# EAGLE board AtxPowerDispatcher3 (EAGLE 6.1)
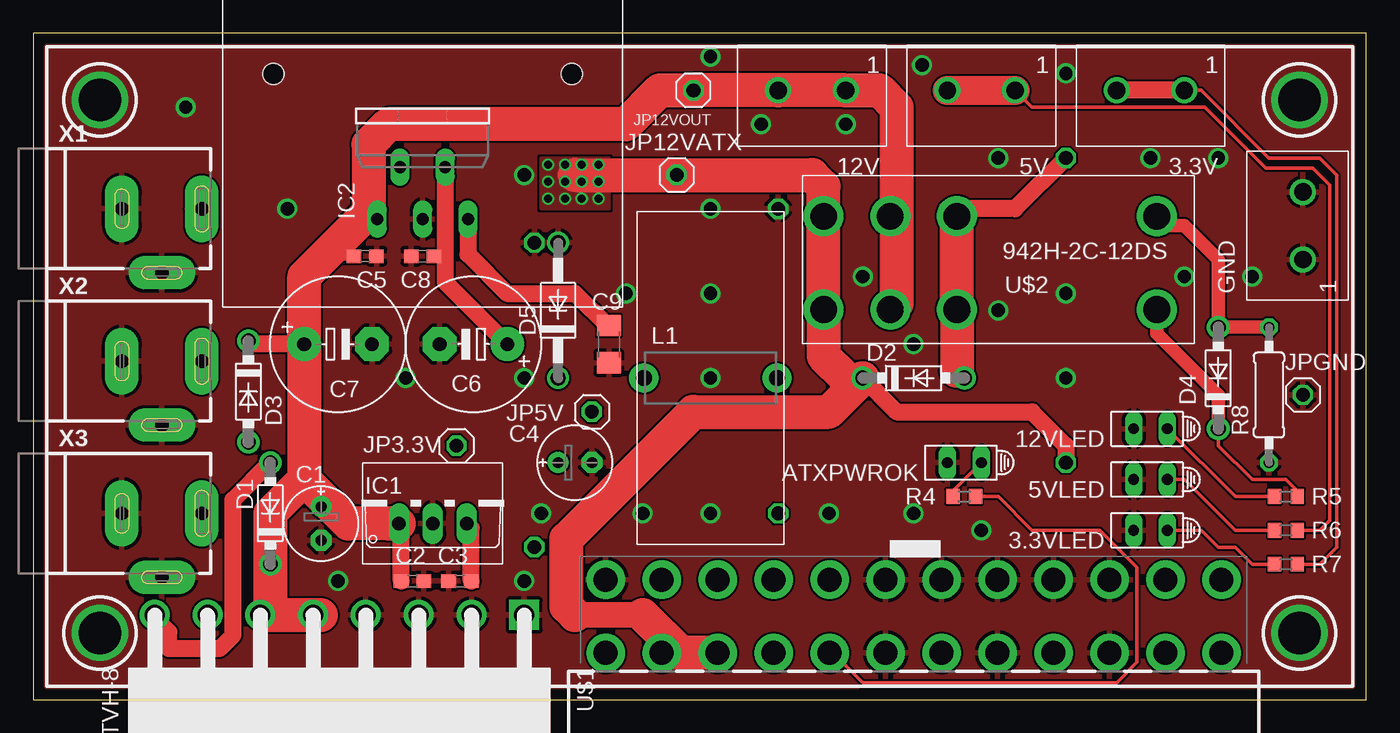
[diagram p0: board, top side]
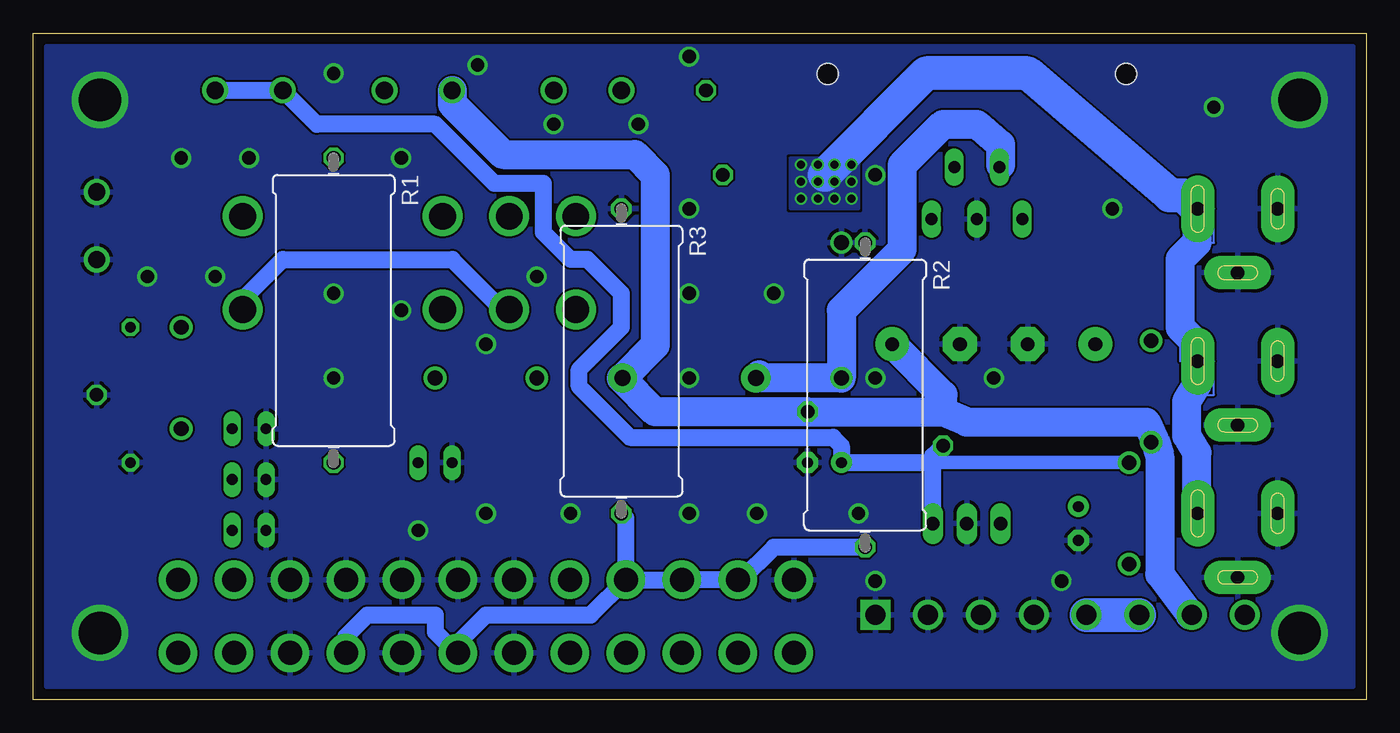
[diagram p1: board, bottom side, seen from below]

Size 100 x 50 mm. Coordinates in mm from the lower left corner, seen from the top.
Outline: 0,0 100,0 100,50 0,50 0,0
Copper layers (1*16): Top 0.035mm / dielectric 1.5mm / Bottom 0.035mm
Design rules: minimum track width 6mil, minimum drill 12mil, track to track 6mil, track to pad 6mil, pad to pad 6mil, via to via 6mil, smd to smd 0mil, copper to edge 0mil, drill to drill 10mil, minimum pad ring 10mil, minimum via ring 6mil, stop-mask expansion 2mil, vias tented up to drill 100mil, thermal gap 10mil

## Footprints (pad centres in the part's own frame; a part is rotated, then mirrored left to right if it is on the bottom)
1X02_BIG = drill 1.3: P$1 0,0; P$2 5.08,0
HLMP6 = drill 0.813 long: A -1.27,0; K 1.27,0
E2,5-6E = drill 0.813 pad 1.575: + -1.27,0 | drill 0.813 pad 1.575 octagon: - 1.27,0
C0603 = smd 1.1 x 1: 1 -0.85,0; 2 0.85,0
E5-10,5 = drill 1.016 pad 2.54: + -2.54,0 | drill 1.016 pad 2.54 octagon: - 2.54,0
C1206 = smd 1.6 x 1.8: 1 -1.4,0; 2 1.4,0
DO41-7.6 = drill 1.1 pad 1.7: A 3.81,0; C -3.81,0
DO41Z10 = drill 1.118: A 5.08,0; C -5.08,0
TO220V = drill 1.016 long: 1 -2.54,-2.54; 2 0,-2.54; 3 2.54,-2.54
TO220-5 = drill 0.9 long: 1 -3.4,-8.4; 2 -1.7,-4.5; 3 0,-8.4; 4 1.7,-4.5; 5 3.4,-8.4 | hole 1.6: -11.2,2.5; 11.2,2.5
ATX24_RIGHT_ANGLE = drill 1.8 pad 2.9: 1 23.1,4.76; 2 18.9,4.76; 3 14.7,4.76; 4 10.5,4.76; 5 6.3,4.76; 6 2.1,4.76; 7 -2.1,4.76; 8 -6.3,4.76; 9 -10.5,4.76; 10 -14.7,4.76; 11 -18.9,4.76; 12 -23.1,4.76; 13 23.1,10.26; 14 18.9,10.26; 15 14.7,10.26; 16 10.5,10.26; 17 6.3,10.26; 18 2.1,10.26; 19 -2.1,10.26; 20 -6.3,10.26; 21 -10.5,10.26; 22 -14.7,10.26; 23 -18.9,10.26; 24 -23.1,10.26
1X01 = drill 1.016 octagon: 1 0,0
2200-12.7 = drill 1.2 pad 2.184: 1 -5,0; 2 5,0
0922/22 = drill 1.016 octagon: 1 -11.43,0; 2 11.43,0
R0603 = smd 1 x 1.1: 1 -0.85,0; 2 0.85,0
0207/10 = drill 0.813 octagon: 1 -5.08,0; 2 5.08,0
VH_8 = drill 1.5 square: 1 0,0 | drill 1.5: 2 3.96,0; 3 7.92,0; 4 11.88,0; 5 15.84,0; 6 19.8,0; 7 23.76,0; 8 27.72,0
942H = drill 2: 1 -11.9,3.75; 2 3.1,3.75; 3 8.1,3.75; 4 13.1,3.75; '1 -11.9,-3.25; '2 3.1,-3.25; '3 8.1,-3.25; '4 13.1,-3.25
2DC-0005D100 = drill 1 pad 2.5 long: 1 3.75,0; 2 -2.25,0; 3 0.75,-4.8

## Placement (x,y rotation side)
3.3V  [1X02_BIG]  86.36,45.72 180 top
3.3VLED  HLMP6  [HLMP6]  83.82,12.7 180 top
5V  [1X02_BIG]  73.66,45.72 180 top
5VLED  HLMP6  [HLMP6]  83.82,16.51 180 top
12V  [1X02_BIG]  60.96,45.72 180 top
12VLED  HLMP6  [HLMP6]  83.82,20.32 180 top
ATXPWROK  HLMP6  [HLMP6]  69.85,17.78 180 top
C1  33u  [E2,5-6E]  21.59,13.21 270 top
C2  0.1u  [C0603]  28.45,8.89 0 top
C3  0.1u  [C0603]  32,8.89 180 top
C4  100u  [E2,5-6E]  40.64,17.78 0 top
C5  0.1u  [C0603]  24.89,33.27 0 top
C6  1000uF low-ESR  [E5-10,5]  22.86,26.67 0 top
C7  1000uF low-ESR  [E5-10,5]  33.02,26.67 180 top
C8  0.1u  [C0603]  29.21,33.27 180 top
C9  10u  [C1206]  43.18,26.67 270 top
D1  1N5817-B  [DO41-7.6]  17.78,13.97 90 top
D2  1N5817-B  [DO41-7.6]  66.04,24.13 0 top
D3  1N5817-B  [DO41-7.6]  16.13,23.11 270 top
D4  1N5817-B  [DO41-7.6]  88.9,24.13 90 top
D5  1N4728  [DO41Z10]  39.37,29.21 90 top
GND  [1X02_BIG]  95.25,33.02 90 top
IC1  788TV  [TO220V]  29.97,15.75 0 top
IC2  SI-8050  [TO220-5]  29.21,44.45 0 top
J1  ATX24RH  [ATX24_RIGHT_ANGLE]  66.04,-1.27 0 top
JP3.3V  [1X01]  31.75,19.05 90 top
JP5V  [1X01]  41.91,21.59 0 top
JP12VATX  [1X01]  48.26,39.37 0 top
JP12VOUT  [1X01]  49.53,45.72 180 top
JPGND  [1X01]  95.25,22.86 0 top
L1  47uH  [2200-12.7]  50.8,24.13 0 top
R1  30 5W  [0922/22]  77.47,29.21 270 bottom
R2  5 5W  [0922/22]  37.59,22.86 270 bottom
R3  5 5W  [0922/22]  55.88,25.4 270 bottom
R4  1k  [R0603]  69.85,15.24 0 top
R5  1k  [R0603]  93.98,15.24 0 top
R6  1k  [R0603]  93.98,12.7 0 top
R7  1k  [R0603]  93.98,10.16 0 top
R8  90ohm 1/4W  [0207/10]  92.71,22.86 90 top
U$1  TUS_POWER_SOCKETVH-8  [VH_8]  36.83,6.35 180 top
U$2  942H-2C-12DS  [942H]  72.39,33.02 180 top
X1  DCJACK  [2DC-0005D100]  8.89,36.83 0 top
X2  DCJACK  [2DC-0005D100]  8.89,25.4 0 top
X3  DCJACK  [2DC-0005D100]  8.89,13.97 0 top

## Library data of the parts
3.3V 5V 12V GND IC1 IC2 L1 U$1 U$2 = myparts
3.3VLED 5VLED 12VLED ATXPWROK = display-hp; MF: AGILENT TECHNOLOGIES; MPN: HLMP-6500; OC_FARNELL: 1652490; OC_NEWARK: 40K0088
C1-C9 R4-R7 = rcl
D1-D5 = diode
J1 = SparkFun
JP3.3V JP5V JP12VATX JP12VOUT JPGND = pinhead
R1-R3 R8 = resistor
X1-X3 = kamiki-dcjack

## Nets
3.3V: 3.3V.P$1 3.3V.P$2 C3.1 C4.+ D1.A IC1.3 JP3.3V.1 R7.2 U$1.8
+5V: 5V.P$1 5V.P$2 C7.+ C8.1 D3.A IC2.4 JP5V.1 L1.2 R6.2 U$1.7
+12V: 12V.P$1 12V.P$2 C1.+ C2.1 C5.1 C6.+ D1.C D3.C D4.C IC1.1 IC2.1 JP12VOUT.1 R5.2 U$1.5 U$1.6 U$2.1 U$2.3 U$2.'3
GND: 3.3VLED.K 5VLED.K 12VLED.K ATXPWROK.K C1.- C2.2 C3.2 C4.- C5.2 C6.- C7.- C8.2 C9.2 D5.A GND.P$1 GND.P$2 IC1.2 IC2.3 J1.3 J1.5 J1.7 J1.15 J1.16 J1.17 J1.18 J1.19 J1.24 JPGND.1 R2.1 R3.1 R8.1 U$1.1 U$1.2 U$1.3 U$1.4 X1.2 X1.3 X2.2 X2.3 X3.2 X3.3
N$1: 12VLED.A R5.1
N$2: J1.8 R4.2
N$3: J1.4 J1.6 J1.21 J1.22 J1.23 R2.2 R3.2
N$4: 5VLED.A R6.1
N$5: 3.3VLED.A R7.1
N$6: ATXPWROK.A R4.1
N$8: D4.A R8.2 U$2.'1
N$9: D5.C IC2.2 L1.1
N$10: D2.A R1.1 U$2.2 U$2.'2
N$11: D2.C J1.10 J1.11 JP12VATX.1 R1.2 U$2.4 U$2.'4 X1.1 X2.1 X3.1
N$17: C9.1 IC2.5

## Tracks (layer width: path | path; a pad name or v marks a point on that pad's centre or on a via)
3.3V
  Top 0.152: 8.89,6.35 U$1.8
  Top 0.254: R7.2 96.52,10.16 97.79,11.43 97.79,39.37 96.52,40.64 92.71,40.64 87.63,45.72 3.3V.P$1
  Top 1.27: 3.3V.P$1 3.3V.P$2 | U$1.8 9.11,6.32 | D1.A 14.99,14.99 14.99,4.83 13.97,3.81 10.16,3.81 10.16,5.08 8.89,6.35 | C3.1 32.85,12.87 IC1.3
  Bottom 1.016: 32.51,17.78 D1.A | IC1.3 32.51,13.46
  Bottom 1.27: 3.3V.P$1 3.3V.P$2 78.74,43.18 69.85,43.18 65.41,38.73 61.72,38.73 61.72,35.05 59.69,33.02 58.42,33.02 55.88,30.48 55.88,27.94 59.05,24.77 59.05,23.5 55.24,19.68 40.01,19.68 39.37,19.05 C4.+ 32.51,17.78 | 32.51,13.46 32.51,17.78 | 32.51,17.78 32.51,18.29 JP3.3V.1
+5V
  Top 0.152: C8.1 30.48,33.02 30.91,33.02
  Top 0.254: 5V.P$1 74.93,44.45 87.88,44.45 92.46,39.88 96.01,39.88 97.28,38.61 97.28,13.46 96.52,12.7 R6.2
  Top 1.27: IC2.4 30.91,33.02 30.91,31.32 C7.+
  Top 2.184: 5V.P$2 5V.P$1
  Bottom 0.152: 13.21,6.35 U$1.7 | D3.A 16.51,19.05 15.88,19.43
  Bottom 1.27: 53.34,26.59 53.34,26.67 55.88,24.13
  Bottom 2.184: 5V.P$2 68.58,44.7 64.77,40.89 54.86,40.89 53.34,39.37 53.34,26.67 | 31.75,21.59 29.97,20.83 16.51,20.83 15.88,19.43 15.49,18.29 15.49,9.4 13.21,6.35 | 53.34,26.59 L1.2 | 31.75,21.59 31.75,22.86 C7.+ | 31.75,21.59 JP5V.1 53.34,21.59 55.88,24.13
+12V
  Top 0.152: 22.23,33.66 22.86,33.02 24.13,33.02 C5.1 | 17.78,6.35 U$1.6
  Top 0.254: R5.2 94.83,15.66 93.98,16.51 91.44,16.51 88.9,19.05 D4.C
  Top 0.61: 18.63,9.31 D1.C
  Top 1.016: U$2.1 84.29,27.47 88.9,22.86 D4.C
  Top 1.27: 24.62,36.05 IC2.1 25.15,36.21 | 64.77,36.75 U$2.'3 | 64.77,29.75 U$2.3 | C6.+ 16.38,26.67 D3.C | 17.78,8.89 18.2,9.31 18.2,9.74 D1.C | C2.1 27.6,12.28 26.67,13.21 | 23.62,13.21 22.86,13.21 C1.+
  Top 2.54: 24.62,36.05 22.23,33.66 20.32,31.75 C6.+ 20.32,16.51 | 25.15,36.21 25.15,41.66 26.67,43.18 44.45,43.18 46.99,45.72 JP12VOUT.1 12V.P$2 12V.P$1 63.5,45.72 64.77,44.45 64.77,36.75 64.77,29.75 | 21.59,6.35 17.78,6.35 17.78,8.89 D1.C 17.78,13.97 20.32,16.51 | 20.32,16.51 23.62,13.21 26.67,13.21 IC1.1
  Bottom 0.152: 64.77,29.21 U$2.3
  Bottom 1.27: U$2.1 84.29,30.01 81.28,33.02 68.58,33.02 64.77,29.21 63.5,29.21
  Bottom 2.54: U$1.5 U$1.6
GND  (via drill 1, 3.2)
  other vias: 5,45 5,5 95,45 95,5 11.43,44.45 19.05,36.83 77.47,46.99 60.96,43.18 50.8,48.26 77.47,30.48 77.47,24.13 71.12,12.7 72.39,29.21 72.39,40.64 66.04,13.97 66.04,26.67 62.23,31.75 66.67,47.62 59.69,13.97 50.8,13.97 50.8,24.13 50.8,30.48 50.8,36.83 54.61,43.18 45.72,13.97 38.1,13.97 36.83,24.13 36.83,39.37 36.83,8.89 83.82,40.64 88.9,40.64 86.36,31.75 91.44,31.75 44.45,30.48 22.86,8.89 27.94,24.13
  pour Bottom (rank 3): 1,49 1,1 99,1 99,49
  pour Top (rank 3): 1,49 1,1 99,1 99,49
N$1
  Top 0.254: R5.1 90.17,15.24 12VLED.A
N$2
  Top 0.152: 71.12,15.24 R4.2
  Top 0.254: J1.8 60.01,3.49 62.23,1.27 81.28,1.27 82.8,2.79 82.8,9.91 80.01,12.7 74.93,12.7 72.39,15.24 71.12,15.24
N$3
  Bottom 0.152: 46.99,8.89 J1.23
  Bottom 1.27: J1.4 76.54,4.74 74.93,6.35 69.85,6.35 69.85,5.08 68.26,3.49 J1.6 68.14,4.25 66.04,6.35 58.18,6.35 J1.21 | J1.21 J1.22 J1.23 | R2.2 44.45,11.43 46.99,8.89 | J1.21 55.54,13.63 R3.2
N$4
  Top 0.254: R6.1 90.17,12.7 86.36,16.51 5VLED.A
N$5
  Top 0.254: 3.3VLED.A 87.63,12.7 88.9,11.43 90.17,11.43 91.44,10.16 R7.1
N$6
  Top 0.254: R4.1 69,15.66 ATXPWROK.A
N$8
  Top 1.016: R8.2 D4.A 88.9,33.02 86.36,35.56 85,35.56 U$2.'1
N$9
  Bottom 0.152: 45.72,24.13 L1.1
  Bottom 1.27: 27.43,40.13 IC2.2
  Bottom 2.184: 27.43,40.13 27.43,41.66 29.21,43.18 31.75,43.18 34.8,40.13 34.8,33.78 39.37,29.21 D5.C 45.72,24.13 | 45.55,24.38 L1.1
N$10
  Top 1.27: 69.29,24.69 D2.A | R1.1 73.66,36.83 68.58,36.83 69.14,36.27 | 69.14,36.27 69.85,35.56 | U$2.'2 69.14,36.27
  Top 2.54: U$2.'2 U$2.2 69.29,24.69
N$11  (via drill 0.6)
  Top 0.152: 11.43,36.83 X1.1 12.7,36.83
  Top 1.27: R1.2 77.47,19.05 74.93,21.59 64.77,21.59 D2.C 60.96,24.13
  Top 1.93: 45.72,6.35 40.64,6.35
  Top 2.54: J1.11 J1.10 48.58,3.49 45.72,6.35 | 40.64,6.35 40.01,6.99 40.01,12.06 49.53,21.59 59.69,21.59 D2.C | 40.64,39.37 JP12VATX.1 58.42,39.37 59.29,38.5 U$2.'4 U$2.4 59.29,25.8 60.96,24.13
  Bottom 0.152: 13.34,26.04 13.97,25.4 13.97,26.67 13.34,27.3 | X2.1 11.43,25.4 11.43,22.86 12.7,22.86 13.46,22.35 | 12.7,34.29 11.43,34.29 11.43,36.83 X1.1
  Bottom 2.184: X3.1 12.7,13.97 12.7,18.54 13.46,19.81 13.46,22.35 12.7,23.62 12.7,26.67 13.34,27.3 13.97,27.94 13.97,33.02 12.7,34.29 12.7,36.83
  Bottom 2.54: 40.64,39.37 33.02,46.99 25.4,46.99 14.73,37.85 13.72,37.85 12.7,36.83
  other vias: 38.61,40.13 39.88,40.13 41.15,40.13 42.42,40.13 38.61,38.86 39.88,38.86 41.15,38.86 42.42,38.86 42.42,37.59 41.15,37.59 39.88,37.59 38.61,37.59
  pour Top: 38.1,40.64 38.1,36.83 43.18,36.83 43.18,40.64
  pour Bottom: 38.1,40.64 38.1,36.83 43.18,36.83 43.18,40.64
N$17
  Top 0.152: 43.18,27.94 C9.1
  Top 1.27: IC2.5 32.61,33.43 35.56,30.48 40.64,30.48 43.18,27.94